# Altium PCB LoRaWAN Senior Project PCB.PcbDoc
Units mil, origin at the board's own origin, x right, y up, seen from the top; angles counter-clockwise.
Board outline 5000 x 2500 mil, 2 copper layers (Top Layer, Bottom Layer); 30 components, 27 nets, 105 pads, 2 vias.
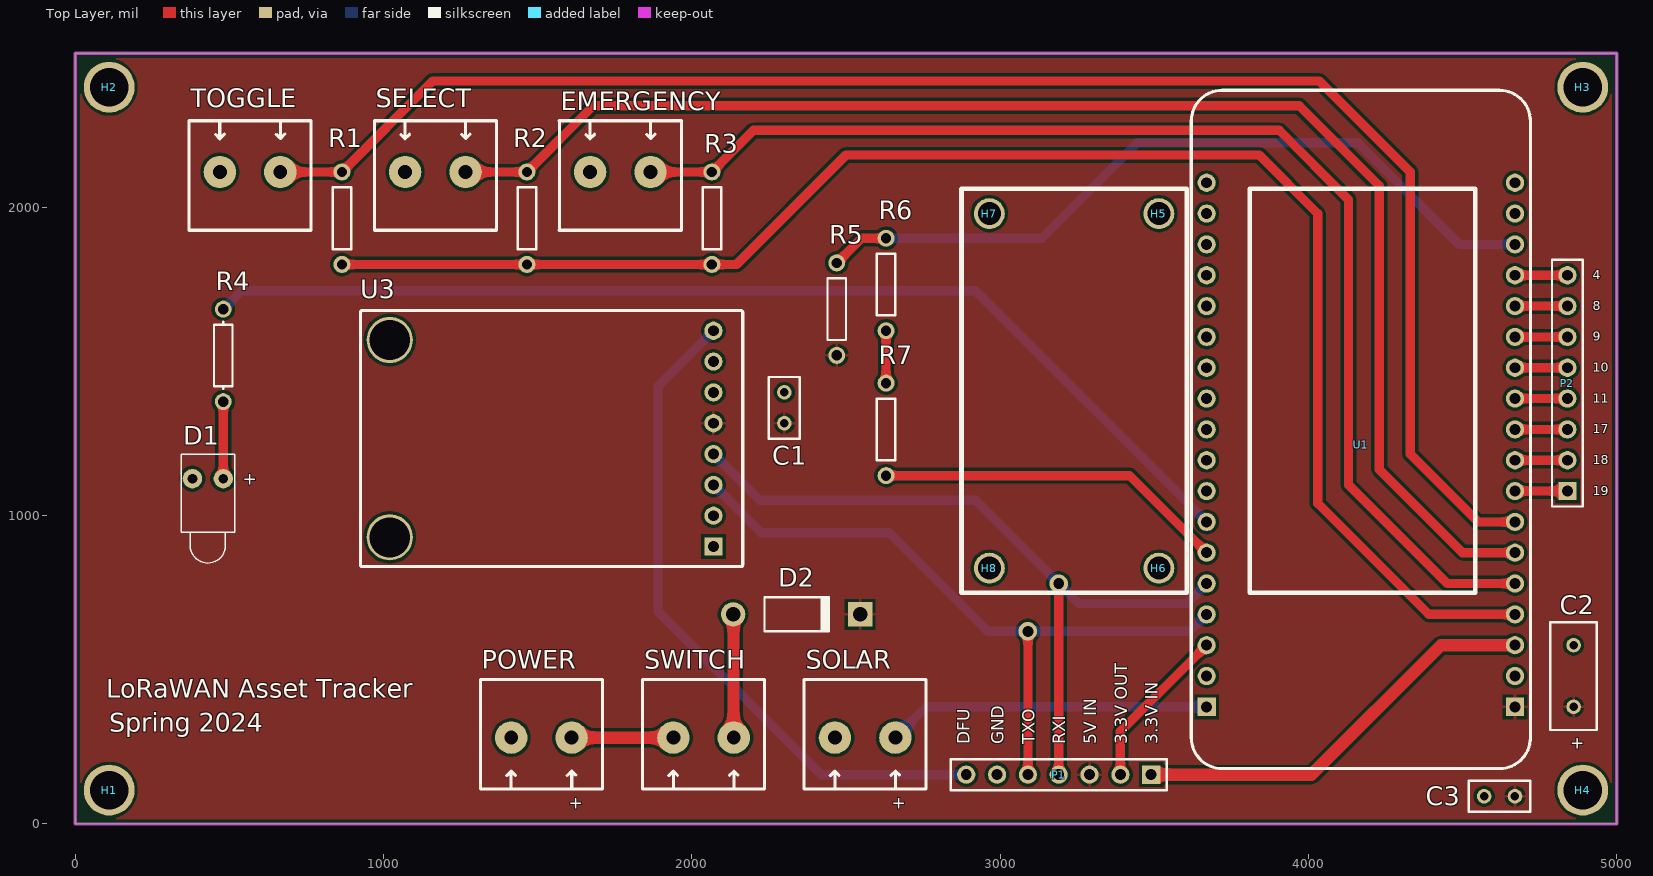
[diagram p0: Top Layer view]
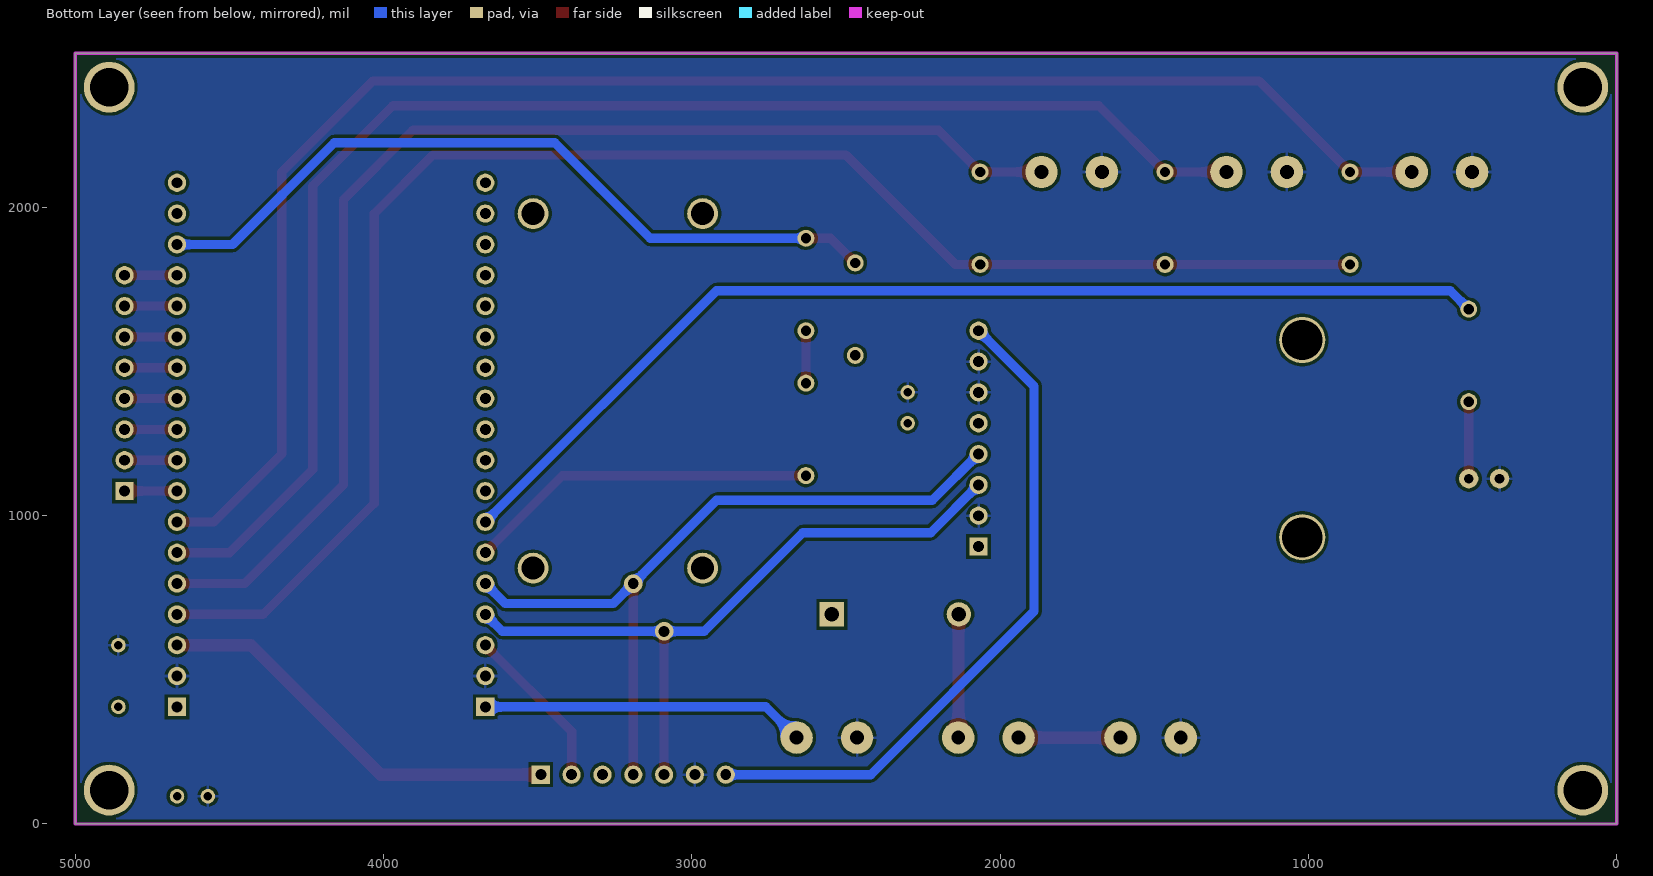
[diagram p1: Bottom Layer view, seen from below]

## Layer stack, top to bottom
Top Solder: solder mask 0.4, Solder Resist, Dk 3.5
Top Layer: signal copper 1.4
Dielectric 1: dielectric 12.6, FR-4, Dk 4.8
Bottom Layer: signal copper 1.4
Bottom Solder: solder mask 0.4, Solder Resist, Dk 3.5

## Board outline
0,0 0,2500 5000,2500 5000,0

## Design rules (kind name [scope] priority, off if disabled: settings)
Clearance [All] p1: gap=10 ignorepadtopadclearanceinfootprint=FALSE except(0: Arc-Hole Track-Hole SMDPad-Hole THPad-Hole Via-Hole Fill-Hole Poly-Hole Region-Hole Text-Hole)
PolygonConnect [All] p1: connectstyle=Relief reliefconductorwidth=10 reliefentries=4 polygonreliefangle="90 Angle" airgapwidth=10
RoutingVias [All] p1: holewidth=28 width=50 viastyle="Through Hole" minholewidth=28 minwidth=50 maxholewidth=36 maxwidth=60
SolderMaskExpansion [All] p1: expansion=4 istentingtop=FALSE
Width [All] p1: maxlimit=50 minlimit=10 preferedwidth=20 minimp=50.000000 maximp=50.000000 favimp=50.000000
30 further rules are at their usual default settings.

## Components (designator, comment, footprint, x,y, rotation, side; value= is the part's Value field where it differs from the comment)
C1 "Cap" RAD-0.1 2300,1350 r270 top value=100nF
C2 "Cap Pol1" RAD-0.2 4860,480 r90 top value=100uF
C3 "Cap" RAD-0.1 4620,90 r0 top value=100nF
D1 "LED1" LED-1 430,1120 r270 top
D2 "Diode 1N5819" DO-41 2340,680 r0 top
EMERGENCY "Button Port" CON2screw 1866,2115 r180 top
H1 "Hole 125mil" "Hole 125mil" 110,110 r0 top
H2 "Hole 125mil" "Hole 125mil" 110,2390 r0 top
H3 "Hole 125mil" "Hole 125mil" 4890,2390 r0 top
H4 "Hole 125mil" "Hole 125mil" 4890,110 r0 top
H5 "Hole 3mm" "Hole 3mm" 3905,1805 r0 top
H6 "Hole 3mm" "Hole 3mm" 3905,655 r0 top
H7 "Hole 3mm" "Hole 3mm" 3355,1805 r0 top
H8 "Hole 3mm" "Hole 3mm" 3355,655 r0 top
P1 "Debug Headers" HDR1X7 3490,160 r180 top
P2 "Header 8" HDR1X8 4840,1080 r90 top
POWER "Power Port" CON2screw 1414,280 r0 top
R1 "Res1" RESISTOR 865,1965 r90 top value=1k
R2 "Res1" RESISTOR 1465,1965 r90 top value=1k
R3 "Res1" RESISTOR 2065,1965 r90 top value=1k
R4 "Res1" AXIAL-0.3 480,1520 r90 top value=1K
R5 "Res1" RESISTOR 2470,1670 r270 top value=10k
R6 "Res1" RESISTOR 2630,1750 r90 top value=4.7k
R7 "Res1" RESISTOR 2630,1280 r90 top value=3k
SELECT "Button Port" CON2screw 1266,2115 r180 top
SOLAR "Solar Port" CON2screw 2464,280 r0 top
SWITCH "Switch Port" CON2screw 1940,280 r0 top
TOGGLE "Button Port" CON2screw 665,2115 r180 top
U1 "Heltec Dev-Board" HELTEC 4670,380 r180 top
U3 "BLE" "ADAFRUIT BLE" 2065,885 r90 top

## Footprints (in the part's own frame and the unit in brackets; to place one, negate y for a bottom-side part, rotate by r counter-clockwise, add the part's x,y. Pads: shape width x height; smd on the part's side, far side on the other; paste and mask are expansions set on the pad)
"ADAFRUIT BLE" [mm]
  rect 1.5x1.5 hole 0.9: 1(0.381,-0.127)
  round 1.5 hole 0.9: 2(2.921,-0.127) 3(5.461,-0.127) 4(8.001,-0.127) 5(10.541,-0.127) 6(13.081,-0.127) 7(15.621,-0.127) 8(18.161,-0.127)
  round 3.81 hole 3.302: ""(1.143,26.543) ""(17.399,26.543)
  silkscreen extent -1.27,-2.54 19.81,28.96
AXIAL-0.3 [mm] "Axial Device, Thru-Hole; 2 Leads; 0.3 in Pin Spacing"
  round 1.4 hole 0.85: 1(-3.81,0) 2(3.81,0)
  silkscreen extent -2.77,-0.76 2.77,0.76
CON2screw [mil]
  round 105 hole 45: 1(0,0) 2(196,0)
  silkscreen extent -100,-166 296,189
DO-41 [mm] "Diode, Axial; Body 5.2 x 2.7 mm (LxDia. max), Lead Dia. 0.86 mm (max)"
  round 2 hole 1.2: 1(-5.23,0)
  rect 2x2 hole 1.2: 2(5.23,0)
  silkscreen extent -2.65,-1.4 2.75,1.4
HDR1X7 [mm] "Connector; Header; 7 Position"
  rect 1.5x1.5 hole 0.9: 1(0,0)
  round 1.5 hole 0.9: 2(2.54,0) 3(5.08,0) 4(7.62,0) 5(10.16,0) 6(12.7,0) 7(15.24,0)
  silkscreen extent -1.27,-1.27 16.51,1.27
HDR1X8 [mm] "Connector; Header; 8 Position"
  rect 1.5x1.5 hole 0.9: 1(0,0)
  round 1.5 hole 0.9: 2(2.54,0) 3(5.08,0) 4(7.62,0) 5(10.16,0) 6(12.7,0) 7(15.24,0) 8(17.78,0)
  silkscreen extent -1.27,-1.27 19.05,1.27
HELTEC [mm]
  rect 1.5x1.5 hole 0.9: 1(25.4,0) 36(0,0)
  round 1.5 hole 0.9: 2(25.4,-2.54) 3(25.4,-5.08) 4(25.4,-7.62) 5(25.4,-10.16) 6(25.4,-12.7) 7(25.4,-15.24) 8(25.4,-17.78) 9(25.4,-20.32) 10(25.4,-22.86) 11(25.4,-25.4) 12(25.4,-27.94) 13(25.4,-30.48) 14(25.4,-33.02) 15(25.4,-35.56) 16(25.4,-38.1) 17(25.4,-40.64) 18(25.4,-43.18) 19(0,-43.18) 20(0,-40.64) 21(0,-38.1) 22(0,-35.56) 23(0,-33.02) 24(0,-30.48) 25(0,-27.94) 26(0,-25.4) 27(0,-22.86) 28(0,-20.32) 29(0,-17.78) 30(0,-15.24) 31(0,-12.7) 32(0,-10.16) 33(0,-7.62) 34(0,-5.08) 35(0,-2.54)
  silkscreen extent -1.27,-50.8 26.67,5.08
"Hole 3mm" [mil]
  round 100 hole 75: 1(-390,175)
"Hole 125mil" [mil]
  round 165 hole 125: 1(0,0)
LED-1 [mm] "LED; 2 Leads"
  round 1.6 hole 0.8: 1(0,1.27) 2(0,-1.27)
  silkscreen extent -2,-2.2 6.95,2.2
RAD-0.1 [mm] "Radial Cap, Thru-Hole; 2 Leads; 0.1 in Pin Spacing"
  round 1.2 hole 0.7: 1(-1.27,0) 2(1.27,0)
  silkscreen extent -2.54,-1.27 2.54,1.27
RAD-0.2 [mm] "Radial Cap, Thru-Hole; 2 Leads; 0.2 in Pin Spacing"
  round 1.2 hole 0.7: 1(-2.54,0) 2(2.54,0)
  silkscreen extent -4.44,-1.91 4.44,1.91
RESISTOR [mm]
  round 1.4 hole 0.85: 1(-3.81,0) 2(3.81,0)
  silkscreen extent -2.54,-0.76 2.54,0.76

## Part data
C1 C3: "Capacitor", LatestRevisionDate=17-Jul-2002, LatestRevisionNote="Re-released for DXP Platform.", PackageDescription="Radial Cap, Thru-Hole; 2 Leads; 0.3 in Pin Spacing", PackageReference=RAD-0.3, Published=8-Jun-2000, Publisher="Altium Limited"
C2: "Polarized Capacitor (Radial)", LatestRevisionDate=17-Jul-2002, LatestRevisionNote="Re-released for DXP Platform.", PackageDescription="Polarized Capacitor (Radial); 2 Leads", PackageReference=RB7.6-15, Published=8-Jun-2000, Publisher="Altium Limited"
D1: "Typical RED GaAs LED", LatestRevisionDate=08-Jul-2005, LatestRevisionNote="Mech Layer 1 removed.", PackageDescription="LED; 2 Leads", PackageReference=LED-1, Published=8-Jun-2000, Publisher="Altium Limited"
D2: library part "Diode 1N4001", "1 Amp General Purpose Rectifier", Code_JEDEC=DO-204-AL, ComponentLink1Description="Manufacturer Link", ComponentLink1URL=http://www.fairchildsemi.com/, ComponentLink2Description=Datasheet, ComponentLink2URL=http://www.fairchildsemi.com/ds/1N%2F1N4001.pdf, DatasheetVersion=1998, LatestRevisionDate=17-Jul-2002, LatestRevisionNote="Re-released for DXP Platform.", PackageDescription="Diode, Axial; Body 5.2 x 2.7 mm (LxDia. max), Lead Dia. 0.86 mm (max)", PackageReference=DO-41, PackageVersion=Aug-1999, Published=8-Jun-2000, Publisher="Altium Limited"
EMERGENCY POWER SELECT SOLAR SWITCH TOGGLE: library part Power
P1: library part "Header 7", "Header, 7-Pin", LatestRevisionDate=17-Jul-2002, LatestRevisionNote="Re-released for DXP Platform.", Publisher="Altium Limited"
P2: "Header, 8-Pin", LatestRevisionDate=17-Jul-2002, LatestRevisionNote="Re-released for DXP Platform.", Publisher="Altium Limited"
R1 R2 R3 R4 R5 R6 R7: "Resistor", LatestRevisionDate=17-Jul-2002, LatestRevisionNote="Re-released for DXP Platform.", PackageDescription="Axial Device, Thru-Hole; 2 Leads; 0.3 in Pin Spacing", PackageReference=AXIAL-0.3, Published=8-Jun-2000, Publisher="Altium Limited"
U3: library part "Adafruit BLE"

## Via types
v1: diameter 60, hole 35.43, Top Layer to Bottom Layer, 2 vias

## Nets (pads, with @x,y where several pads share a name; then routed paths per layer and width w, separated by ;. In a path a pad name is that pad's centre, name@x,y a point inside that pad or via, vN(x,y) a via of type N, cw(c..) or ccw(c..) an arc to the next point about the centre after c; other vN are vias at no path point)
3.3V_INPUT: P1.1 U1.34 | length 1354
  Top Layer w40: P1.1 4010,160 4430,580 U1.34
3.3V_OUTPUT: P1.2 U1.3 | length 536
  Top Layer w30: P1.2 3390,300 U1.3
5V_INPUT: C1.2 C2.1 C3.2 D2.2 P1.3 R5.2 U1.36 U3.5
B_POW: R1.1 R2.1 R3.1 U1.33 | length 5119.9
  Top Layer w30: R1.1 R2.1 R3.1 2145,1815 2500,2170 3840,2170 4030,1980 4030,1040 4390,680 U1.33
DFU: P1.7 U3.8 | length 2204.1
  Bottom Layer w30: U3.8 1890,1420 1890,690 2420,160 P1.7
EMERGENCY_BUTTON: EMERGENCY.1 R3.2 U1.32 | length 4010.7
  Top Layer w30: EMERGENCY.1 R3.2 2200,2250 3905,2250 4130,2025 4130,1100 4450,780 U1.32
GND: C1.1 C2.2 C3.1 D1.2 EMERGENCY.2 P1.6 POWER.1 SELECT.2 SOLAR.1 TOGGLE.2 U1.2 U1.35 U3.2 U3.6 U3.7
LED: R4.2 U1.7 | length 3525.5
  Bottom Layer w30: R4.2 540,1730 2920,1730 U1.7
NetD1_1: D1.1 R4.1 | length 250
  Top Layer w30: D1.1 R4.1
NetD2_1: D2.1 SWITCH.2 | length 401.5
  Top Layer w30: D2.1@2133.59,679.5 D2.1
  Top Layer w40: D2.1 2135.05,679.05 2135.05,280.95 SWITCH.2
NetP2_1: P2.1 U1.29 | length 170
  Top Layer w30: U1.29 P2.1
NetP2_2: P2.2 U1.28 | length 170
  Top Layer w30: U1.28 P2.2
NetP2_3: P2.3 U1.27 | length 170
  Top Layer w30: U1.27 P2.3
NetP2_4: P2.4 U1.26 | length 170
  Top Layer w30: U1.26 P2.4
NetP2_5: P2.5 U1.25 | length 170
  Top Layer w30: U1.25 P2.5
NetP2_6: P2.6 U1.24 | length 170
  Top Layer w30: U1.24 P2.6
NetP2_7: P2.7 U1.23 | length 170
  Top Layer w30: U1.23 P2.7
NetP2_8: P2.8 U1.22 | length 170
  Top Layer w30: U1.22 P2.8
NetPOWER_2: POWER.2 SWITCH.1 | length 330
  Top Layer w40: POWER.2 SWITCH.1
NetR6_1: R6.1 R7.2 | length 170
  Top Layer w30: R7.2 R6.1
RXI: P1.4 U1.5 U3.4 | length 2447.8
  Top Layer w30: P1.4 v1(3190,780)
  Bottom Layer w30: U3.4 2220,1050 2920,1050 v1(3190,780) 3255,715 3605,715 U1.5
Select_Button: R2.2 SELECT.1 U1.31 | length 4632.6
  Top Layer w30: SELECT.1 R2.2 1680,2330 3970,2330 4230,2070 4230,1150 4500,880 U1.31
SOLAR_INPUT: SOLAR.2 U1.1 | length 1051.4
  Bottom Layer w30: SOLAR.2 2760,380 U1.1
Toggle_Button: R1.2 TOGGLE.1 U1.30 | length 5255.5
  Top Layer w30: TOGGLE.1 R1.2 1160,2410 4035,2410 4330,2115 4330,1200 4550,980 U1.30
TXO: P1.5 U1.4 U3.3 | length 2284.5
  Top Layer w30: P1.5 v1(3090,625)
  Bottom Layer w30: U3.3 2225,945 2640,945 2960,625 v1(3090,625) 3615,625 U1.4
VBAT_ADC: R5.1 R6.2 U1.21 | length 2498.2
  Top Layer w30: R5.1 2550,1900 R6.2
  Bottom Layer w30: R6.2 3135,1900 3445,2210 4160,2210 4490,1880 U1.21
VBAT_GND: R7.1 U1.6 | length 1143.6
  Top Layer w30: R7.1 3420,1130 U1.6
pads on no net: H1.1 H2.1 H3.1 H4.1 H5.1 H6.1 H7.1 H8.1 U1.8 U1.9 U1.10 U1.11 U1.12 U1.13 U1.14 U1.15 U1.16 U1.17 U1.18 U1.19 U1.20 U3. U3.1

## Polygon pours and split planes (outlines as drawn)
5V_INPUT on Top Layer "NONET_L-01_P-001" (solid, pour order 1): 0,2500 5000,2500 5000,0 0,0
GND on Bottom Layer "NONET_L-01_P-001" (solid, pour order 0): 0,2500 5000,2500 5000,0 0,0

## Keep-outs
Keep-Out Layer:
  the board outline again, w10

## Silkscreen, mask and mechanical layers (free items; w line width, h text height)
Top Overlay:
  lines w15: 2874.5,750 3605.5,750 3605.5,2060 2874.5,2060 2874.5,750 ; 3810,750 4541,750 4541,2060 3810,2060 3810,750
  text "4" at 4922,1767 h30
  text "8" at 4922,1667 h30
  text "9" at 4922,1567 h30
  text "10" at 4922,1467 h30
  text "11" at 4922,1367 h30
  text "17" at 4922,1267 h30
  text "18" at 4922,1167 h30
  text "+" at 543.66,1099.94 h40
  text "19" at 4922,1067 h30
  text "LoRaWAN Asset Tracker" at 100,410 h60
  text "Spring 2024" at 110,299.99 h60
  text "DFU" at 2902,258 h40 r90
  text "GND" at 3012,258 h40 r90
  text "TXO" at 3112,258 h40 r90
  text "RXI" at 3212,258 h40 r90
  text "5V IN" at 3312,258 h40 r90
  text "3.3V OUT" at 3412,258 h40 r90
  text "3.3V IN" at 3512,258 h40 r90
  text "+" at 4850,243.34 h40
  text "+" at 1600,50 h40
  text "+" at 2648.66,49.94 h40